# Altium PCB STM32_display_test_board.PcbDoc (part 2 of 2)
Units mil, origin at the board's own origin, x right, y up, seen from the top; angles counter-clockwise.
Board outline 3128.03 x 3003.03 mil, 4 copper layers (Top Layer(SIG/PWR), Int1 (GND), Int2 (GND), Bottom Layer(SIG/PWR)), stack 73.221 mil thick; 85 components, 77 nets, 331 pads, 163 vias.
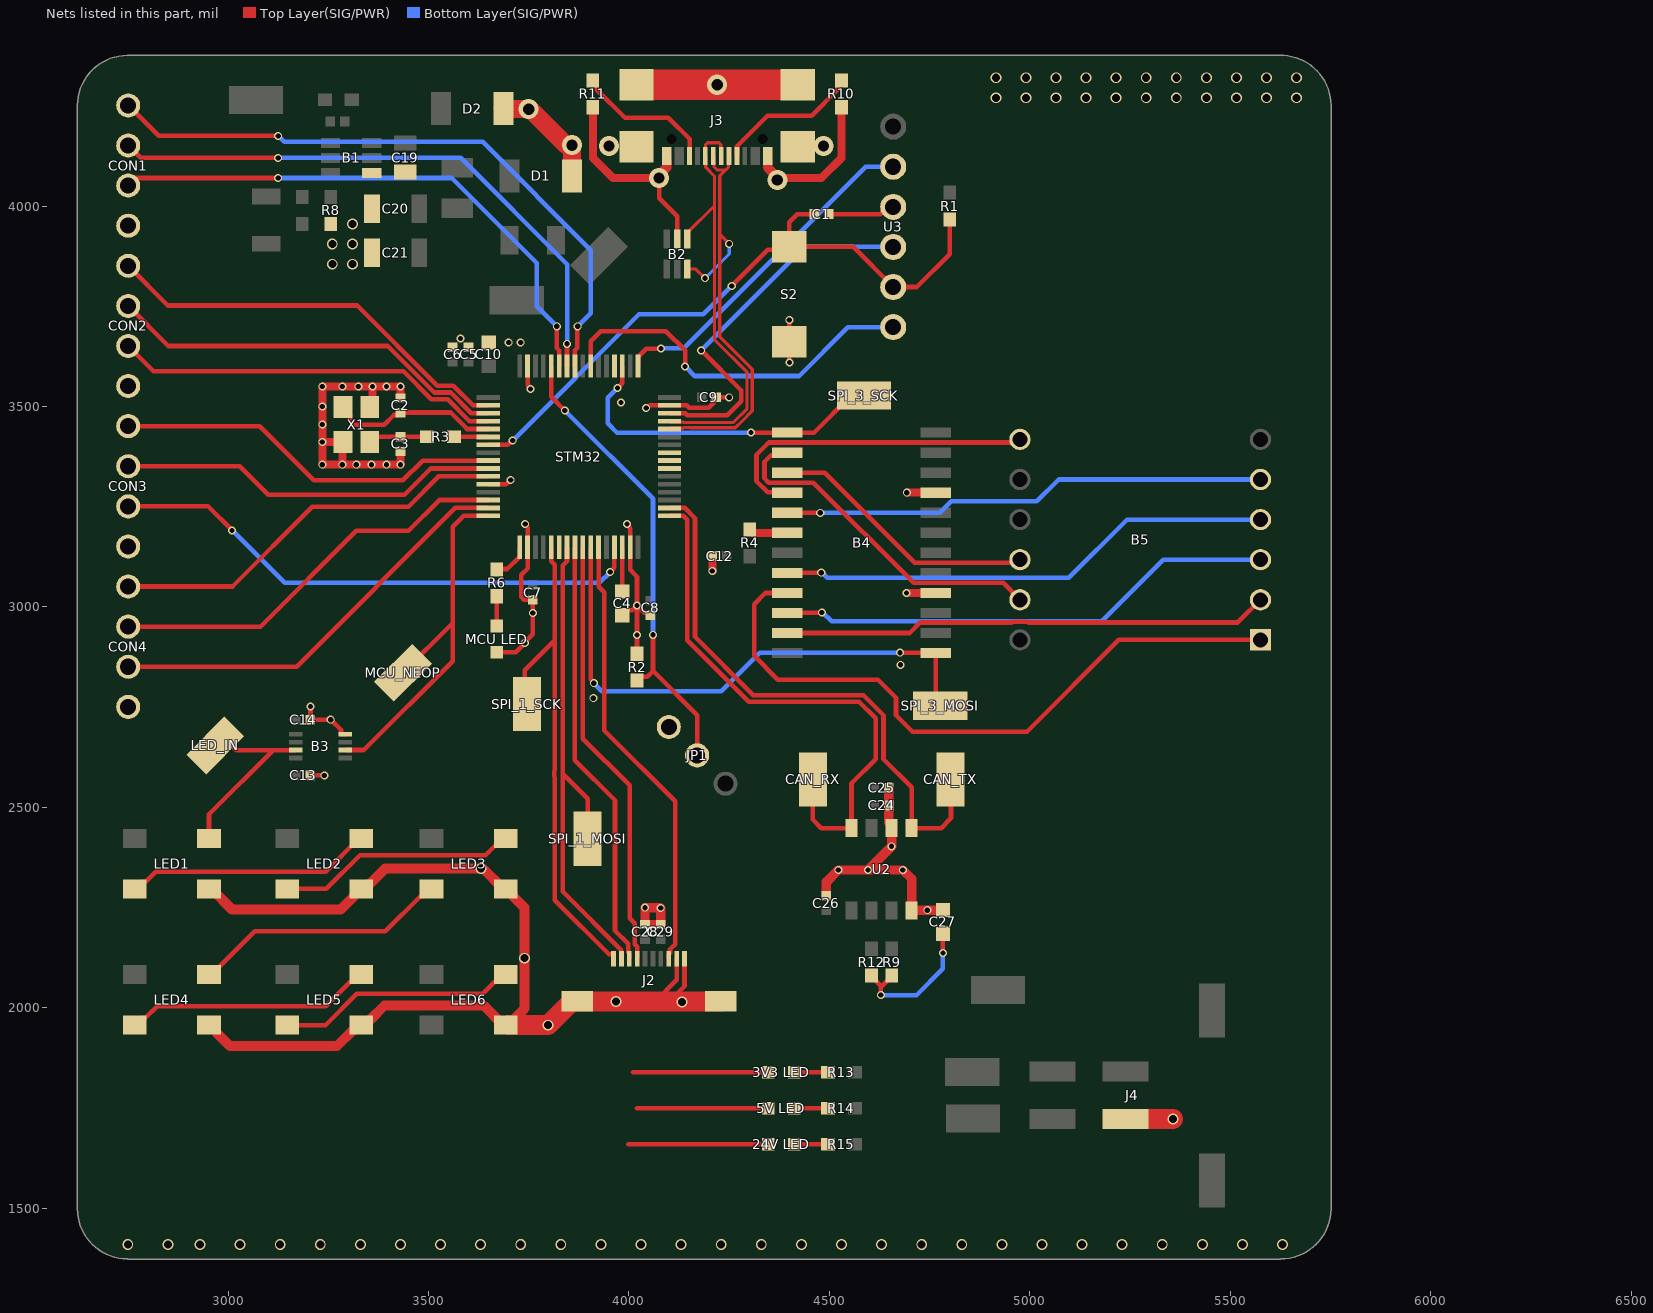
[diagram p4: the nets of this part, all layers, seen from the top]

## Via types
v1: diameter 20, hole 13, Top Layer(SIG/PWR) to Bottom Layer(SIG/PWR), tented both sides, 77 vias
v2: diameter 27, hole 20, Top Layer(SIG/PWR) to Bottom Layer(SIG/PWR), tented both sides, 74 vias
v3: diameter 50, hole 28, Top Layer(SIG/PWR) to Bottom Layer(SIG/PWR), tented both sides, 12 vias

## Nets (pads, with @x,y where several pads share a name; then routed paths per layer and width w, separated by ;. In a path a pad name is that pad's centre, name@x,y a point inside that pad or via, vN(x,y) a via of type N, cw(c..) or ccw(c..) an arc to the next point about the centre after c; other vN are vias at no path point) (continued)
GND: "3V3 LED.1" "5V LED.1" "24V LED.1" "MCU LED.1" B1.1 B2.2 B3.4 B4.4 B4.9 C1.1 C2.1 C3.1 C4.2 C5.1 C6.1 C7.1 C8.1 C9.1 C10.2 C12.1 C13.2 C14.1 C19.2 C20.2 C21.2 C24.1 C25.1 C26.1 C27.1 C28.1 C29.1 CON1.4 CON2.4 CON3.4 CON4.4 D1.1 D2.1 J2.9 J2.10 J2.11 J2.12 J3.A1 J3.A12 J3.B1 J3.B12 J3.MP1 J3.MP2 J3.MP3 J3.MP4 J4.2 JP1.3 LED1.3 LED2.3 LED3.3 LED4.3 LED5.3 LED6.3 R2.2 R8.2 R10.2 R11.2 S2.2 STM32.12 STM32.18 STM32.31 STM32.47 STM32.63 U2.2 U2.8 U3.3 X1.2 X1.4 | length 9029.4
  Top Layer(SIG/PWR) w11.5: C13.2@3205.22,2580 v1(3240,2580) ; v1(3206,2752) 3205.56,2751.56 3205.56,2719.44 C14.1@3205.11,2719 v1(3256.03,2719) 3281.6,2693.43 3281.6,2682.61 3281.76,2682.45 B3.4@3292.58,2682.45 ; STM32.12@3649.09,3306.1 3694.34,3306.1 3705,3316.77 v1(3705,3317) ; 3670,2887.52 3717.52,2887.52 v1(3740,2910) 3740,2911.79 3760,2931.79 C7.1@3760,3017.89 3759.89,3018 3738,3018 3731,3025 3731,3080 3747.05,3096.05 3747.05,3198.65 3741,3204.7 v1(3741,3207) ; STM32.63@3747.05,3600.91 3747.05,3553.25 3754,3546.3 v1(3754,3544) ; C4.2@3983,2979.47 3994.97,2991.44 4007.61,2991.44 v1(4020,3003.83) ; v1(3995,3207) 3995,3204.7 4002.95,3196.75 4002.95,3092.93 4020,3075.88 v1(4020,3003.83) ; 3998.34,1660 4347.52,1660 ; 4010,1840 4347.52,1840 ; 4020,1750 4347.52,1750 ; R2.2@4020,2883.46 v1(4020,3003.83) ; v1(4043,3496) 4045.3,3496 4052.25,3502.95 4144.05,3502.95 4149.83,3497.17 4198.53,3497.17 4211.05,3509.69 4211.05,3516.94 C9.1@4217.11,3523 v1(4250,3523) ; C8.1@4050.61,2979.89 4044.55,2985.95 4037.88,2985.95 v1(4020,3003.83) ; 4065,2016.14 4118.9,2070.04 J2.9@4118.9,2122.44 ; v3(4075,4070) 4075,4019.93 4120,3974.93 B2.2@4120,3917.4 ; 4100,2016.14 4138.58,2054.72 J2.10@4138.58,2122.44 ; v1(4399.95,3716.08) 4399.95,3661.94 S2.2@4400,3661.89 v1(4400,3610) ; C1.1@4498.11,3980 4626.52,3980 4644.52,3998 U3.3@4659,3998
  Top Layer(SIG/PWR) w20: LED4.3@2952.52,1957.01 2958.43,1957.01 2972.05,1943.39 LED4.3@2972.05,1937.48 ; X1.2@3286.54,3411.69 X1.2@3285,3411.69 ; LED5.3@3310.39,1943.39 3318.9,1943.39 3346.14,1970.63 LED5.3@3354.63,1970.63 ; X1.4@3353.47,3498.31 3360,3504.84 v1(3360,3550) ; C3.1@3430,3388.78 v1(3430,3355) v1(3285,3355) ; C2.1@3430,3521.22 v1(3430,3550) v1(3360,3550) ; LED6.3@3686.61,1957.01 LED6.3@3692.52,1957.01 ; R11.2@3910,4246.54 3910,4120 3960,4070 v3(4075,4070) ; v1(4207.89,3090.11) C12.1@4207.89,3127 ; v3(4370,4065) 4374.58,4069.58 4479.58,4069.58 4530,4120 R10.2@4530,4246.54 ; v1(4692,3035) B4.4@4765.51,3035 ; v1(4693,3285) B4.9@4765.51,3285 ; v1(3235,3411.69) v1(3235,3550) v1(3360,3550) ; v1(3235,3411.69) X1.2@3285,3411.69 ; v1(3235,3411.69) v1(3235,3355) v1(3285,3355) ; v1(3285,3355) X1.2@3285,3411.69
  Top Layer(SIG/PWR) w23.5: v3(4075,4070) 4075,4077.17 4093.8,4095.97 J3.A12@4093.8,4114.31 ; J3.B12@4345.77,4114.31 4345.77,4096.41 4370,4072.17 v3(4370,4065) ; C26.1@4492,2279.22 4492.39,2279.22 4492.45,2279.28 4492.45,2314.45 v1(4522,2344) v1(4596,2344) ; C25.1@4648.11,2549 4648.11,2462.89 4655,2456 v1(4655,2403) v1(4596,2344) ; C27.1@4783,2244.06 4782.72,2243.78 4705.28,2243.78 U2.8@4705,2243.5 4705,2322 v1(4683,2344) v1(4596,2344) ; v1@4076.59,2250 cw(c4076.59,2246.59) v1(4079,2249) ; v1@4076.59,2250 cw(c4076.59,2246.59) v1(4079,2249) ; v1@4076.59,2250 cw(c4076.59,2246.59) v1(4079,2249) ; v1@4076.59,2250 cw(c4076.59,2246.59) v1(4079,2249) ; v1@4076.59,2250 cw(c4076.59,2246.59) v1(4079,2249) ; v1@4076.59,2250 cw(c4076.59,2246.59) v1(4079,2249) ; v1@4076.59,2250 cw(c4076.59,2246.59) v1(4079,2249) ; v1@4076.59,2250 cw(c4076.59,2246.59) v1(4079,2249) ; v1@4076.59,2250 v1(4040,2250) C28.1@4040,2208.11 C29.1@4079,2208.11 v1(4079,2249)
  Top Layer(SIG/PWR) w25: LED1.3@2952.52,2297.01 2958.43,2297.01 3010.44,2245 3280.51,2245 3315.49,2279.98 3315.49,2285.89 3326.61,2297.01 LED2.3@3332.52,2297.01 3343.64,2308.13 3352.13,2308.13 3392,2348 v2(3631,2348) 3631.38,2347.62 3636,2347.62 3686.61,2297.01 3698.43,2297.01 3709.55,2285.89 3709.55,2279.98 3739.55,2249.98 3739.55,1998.13 3698.43,1957.01 LED6.3@3692.52,1957.01 ; LED4.3@2972.05,1937.48 3004.53,1905 3272,1905 LED5.3@3310.39,1943.39 ; LED5.3@3354.63,1970.63 3390,2006 3637.62,2006 LED6.3@3686.61,1957.01
  Top Layer(SIG/PWR) w45: D2.1@3683.95,4246 3683.95,4244.41 3686.45,4241.91 v3@3750.09,4241.91 ; v3@3754.09,4240.91 v3@3842.95,4152.05 ; D1.1@3857.95,4075 v3@3857.95,4152.05
  Top Layer(SIG/PWR) w50: LED6.3@3698.43,1957.01 v2(3797.96,1957.01) 3856.5,2015.55 3870.28,2015.55 J2.11@3870.87,2016.14 4065,2016.14 4100,2016.14 J2.12@4229.13,2016.14 ; J4.2@5238.5,1722.94 v2(5356.94,1722.94)
  Top Layer(SIG/PWR) w75: J3.MP2@4018.82,4302.56 J3.MP1@4421.18,4302.56
  other v1: 4744,2243.78 3911.06,2772.57 4676.97,2855.82 4020,2930 3760,2985 3320,3355 3357.5,3355 3395,3355 3235,3455 3235,3500 3980,3510 3285,3550 3325,3550 3395,3550 3700,3660 3730,3660 3580,3670
  other v2: 2750,1410 2850,1410 2930,1410 3030,1410 3130,1410 3230,1410 3330,1410 3430,1410 3530,1410 3630,1410 3730,1410 3830,1410 3930,1410 4030,1410 4130,1410 4230,1410 4330,1410 4430,1410 4530,1410 4630,1410 4730,1410 4830,1410 4930,1410 5030,1410 5130,1410 5230,1410 5330,1410 5430,1410 5530,1410 5630,1410 4132,2015 3967.93,2016.14 3739.55,2124.05 3260,3855 3310,3855 3260,3905 3310,3905 3310,3955 4915,4270 4990,4270 5065,4270 5140,4270 5215,4270 5290,4270 5365,4270 5440,4270 5515,4270 5590,4270 5665,4270 4915,4320 4990,4320 5065,4320 5140,4320 5215,4320 5290,4320 5365,4320 5440,4320 5515,4320 5590,4320 5665,4320
  other v3: 3950,4150 4485,4150 3857.7,4151.8 3749.84,4241.66 4220,4302.56
GPIO_1: CON1.1 STM32.57 | length 1609.1
  Top Layer(SIG/PWR) w11.5: CON1.1@2751,4251 2827,4175 v1(3125,4175) ; STM32.57@3865.16,3600.91 3865.16,3639.8 3871.22,3645.86 3871.22,3699.22 v1(3872,3700)
  Bottom Layer(SIG/PWR) w11.5: v1(3125,4175) 3140,4160 3635,4160 3905,3890 3905,3733 v1(3872,3700)
GPIO_2: CON1.2 STM32.58 | length 1471.1
  Top Layer(SIG/PWR) w11.5: CON1.2@2751,4151 2782,4120 v1(3125,4120) ; STM32.58@3845.47,3600.91 v1(3845.47,3656.53)
  Bottom Layer(SIG/PWR) w11.5: v1(3125,4120) 3580,4120 3845.75,3854.25 3845.75,3656.81 v1(3845.47,3656.53)
GPIO_3: CON1.3 STM32.59 | length 1395.1
  Top Layer(SIG/PWR) w11.5: CON1.3@2751,4051 2770,4070 v1(3125,4070) ; v1(3820,3700) 3819.72,3699.72 3819.72,3645.86 3825.79,3639.8 STM32.59@3825.79,3600.91
  Bottom Layer(SIG/PWR) w11.5: v1(3125,4070) 3558,4070 3770,3858 3770,3750 v1(3820,3700)
GPIO_4: CON2.1 STM32.2 | length 1042.3
  Top Layer(SIG/PWR) w11.5: CON2.1@2751,3851 2850,3752 3322,3752 3522,3552 3562,3552 3610.89,3503.11 3648.94,3503.11 STM32.2@3649.09,3502.95
GPIO_5: CON2.2 STM32.3 | length 1009
  Top Layer(SIG/PWR) w11.5: CON2.2@2751,3751 2851,3651 3398,3651 3514,3535 3555,3535 3606.58,3483.42 3648.94,3483.42 STM32.3@3649.09,3483.27
GPIO_6: CON2.3 STM32.4 | length 975.7
  Top Layer(SIG/PWR) w11.5: CON2.3@2751,3651 2814,3588 3437.67,3588 3507.17,3518.5 3547.5,3518.5 3602.26,3463.74 3648.94,3463.74 STM32.4@3649.09,3463.58
GPIO_10: CON4.1 STM32.11 | length 1011.9
  Top Layer(SIG/PWR) w11.5: CON4.1@2751,3051 3011,3051 3210,3250 3450,3250 3525.79,3325.79 STM32.11@3649.09,3325.79
IOX_RST: STM32.39
LED_1_2: LED1.2 LED2.4 | length 617.2
  Top Layer(SIG/PWR) w11.5: LED1.2@2767.48,2297.01 2785.35,2314.88 2794.88,2314.88 2820,2340 3243.62,2340 3326.61,2422.99 LED2.4@3332.52,2422.99
LED_2_3: LED2.2 LED3.4 | length 597.2
  Top Layer(SIG/PWR) w11.5: LED2.2@3147.48,2297.01 3245.01,2297.01 3329,2381 3642,2381 3666.12,2405.12 3674.65,2405.12 LED3.4@3692.52,2422.99
LED_3_4: LED3.2 LED4.4 | length 643.6
  Top Layer(SIG/PWR) w11.5: LED4.4@2952.52,2082.99 2958.43,2082.99 3066.44,2191 3392,2191 3480.14,2279.14 3489.61,2279.14 LED3.2@3507.48,2297.01
LED_4_5: LED4.2 LED5.4 | length 617.2
  Top Layer(SIG/PWR) w11.5: LED4.2@2767.48,1957.01 2785.35,1974.88 2793.88,1974.88 2823,2004 3244,2004 3305.12,2065.12 3314.65,2065.12 LED5.4@3332.52,2082.99
LED_5_6: LED5.2 LED6.4 | length 597.2
  Top Layer(SIG/PWR) w11.5: LED5.2@3147.48,1957.01 3243.01,1957.01 3321,2035 3635,2035 3665.12,2065.12 3674.65,2065.12 LED6.4@3692.52,2082.99
LED_IN: B3.7 LED1.4 LED_IN.1 | length 491.9
  Top Layer(SIG/PWR) w11.5: LED1.4@2952.52,2422.99 2952.52,2482.87 3112.58,2642.92 ; LED_IN.1@2968,2655 3008.21,2655 3020.29,2642.92 3112.58,2642.92 ; B3.7@3168.57,2643.08 3168.41,2642.92 3112.58,2642.92
MCU_BOOT_0: JP1.2 R2.1 STM32.60 | length 1171.5
  Top Layer(SIG/PWR) w11.5: STM32.60@3806.1,3600.91 3806.1,3523.9 v1(3840,3490) ; R2.1@4020,2816.54 4029.37,2825.91 4045.49,2825.91 4060,2840.41 ; v1@4060,2930 4060,2840.41 ; JP1.2@4170,2630 4170,2730.41 4060,2840.41
  Bottom Layer(SIG/PWR) w11.5: v1(3840,3490) 4060,3270 v1@4060,2930
  other v1: 4059.84,2930.51
MCU_CAN2_RX: CAN_RX.1 STM32.33 U2.4 | length 1404.4
  Top Layer(SIG/PWR) w11.5: STM32.33@4100.91,3227.36 4135.69,3227.36 4145,3218.05 4145,2917.16 4298.66,2763.5 4573.66,2763.5 4615,2722.16 4615,2620 4555,2560 U2.4@4555,2448.5 4479.5,2448.5 4458,2470 4458,2569 CAN_RX.1@4459,2570
MCU_CAN2_TX: CAN_TX.1 STM32.34 U2.1 | length 1437.9
  Top Layer(SIG/PWR) w11.5: STM32.34@4100.91,3247.05 4139.34,3247.05 4164.69,3221.7 4164.69,2925.32 4310,2780 4585,2780 4634.69,2730.32 4634.69,2620.32 4705,2550 U2.1@4705,2448.5 4778.5,2448.5 4803,2473 4803,2569 CAN_TX.1@4802,2570
MCU_I2C_SCL: STM32.41
MCU_I2C_SDA: STM32.40
MCU_LED: R6.1 STM32.17 | length 94
  Top Layer(SIG/PWR) w11.5: R6.1@3670,3093.46 3671.41,3094.87 3696.26,3094.87 3727.21,3125.81 3727.21,3148.94 STM32.17@3727.36,3149.09
MCU_NEOPIXEL: B3.2 MCU_NEOP.1 STM32.16 | length 970.1
  Top Layer(SIG/PWR) w11.5: B3.2@3292.58,2643.08 3292.74,2643.24 3338.24,2643.24 3560,2865 3560,2960 ; MCU_NEOP.1@3436,2836 3560,2960 ; STM32.16@3649.09,3227.36 3587.36,3227.36 3560,3200 3560,2960
MCU_NRST: C1.2 R1.2 S2.1 STM32.7 U3.5 | length 1649.4
  Top Layer(SIG/PWR) w11.5: STM32.7@3649.09,3404.53 3697.23,3404.53 3707.7,3415 v1(3710,3415) ; v1(4256.29,3800.71) 4346.18,3890.6 4392.49,3890.6 S2.1@4400,3898.11 ; C1.2@4461.89,3980 4420,3980 4400,3960 S2.1@4400,3898.11 ; R1.2@4800,3966.54 4800,3880 4718,3798 U3.5@4659,3798 4558.89,3898.11 S2.1@4400,3898.11
  Bottom Layer(SIG/PWR) w11.5: v1(3710,3415) 4025,3730 4185.58,3730 v1(4256.29,3800.71)
MCU_OSC_IN: C2.2 STM32.5 X1.1 | length 419.2
  Top Layer(SIG/PWR) w11.5: X1.1@3286.54,3498.31 3304.41,3480.44 3304.41,3464.59 3314,3455 3390,3455 3413.94,3478.94 3423.94,3478.94 C2.2@3430,3485 3555,3485 3596.1,3443.9 STM32.5@3649.09,3443.9
MCU_OSC_OUT: R3.2 STM32.6 | length 86.6
  Top Layer(SIG/PWR) w11.5: R3.2@3563.46,3425 3563.46,3424.21 STM32.6@3649.09,3424.21 STM32.6@3648.94,3424.37
MCU_SPI1_MISO: STM32.22
MCU_SPI1_MOSI: J2.2 SPI_1_MOSI.1 STM32.23 | length 1279.6
  Top Layer(SIG/PWR) w11.5: STM32.23@3845.47,3149.09 3845.47,3114.31 3834.68,3103.52 3834.68,2584 ; SPI_1_MOSI.1@3897,2422 3897,2521.68 3834.68,2584 ; J2.2@3981.1,2122.44 3980.95,2122.59 3980.95,2144.05 3834.68,2290.32 3834.68,2584
MCU_SPI1_SCK: J2.1 SPI_1_SCK.1 STM32.21 | length 1291.6
  Top Layer(SIG/PWR) w11.5: SPI_1_SCK.1@3746,2758 3740,2764 3740,2842 3815,2917 ; STM32.21@3806.1,3149.09 3806.1,3114.31 3815,3105.41 3815,2917 ; J2.1@3961.42,2122.44 3961.42,2133.63 3961.26,2133.78 3950.08,2133.78 3815,2268.86 3815,2575.66 3813.18,2577.48 3813.18,2590.52 3815,2592.34 3815,2917
MCU_SPI2_MISO: CON3.2 STM32.10 | length 954.6
  Top Layer(SIG/PWR) w11.5: CON3.2@2751,3351 3029,3351 3100,3280 3440,3280 3505.47,3345.47 STM32.10@3649.09,3345.47
MCU_SPI2_MOSI: CON3.1 STM32.9 | length 974.4
  Top Layer(SIG/PWR) w11.5: CON3.1@2751,3451 3079,3451 3214,3316 3436,3316 3485.16,3365.16 STM32.9@3649.09,3365.16
MCU_SPI2_SCK: CON3.3 STM32.29 | length 1358.8
  Top Layer(SIG/PWR) w11.5: CON3.3@2751,3251 2950,3251 v1(3010,3191) ; v1(3953,3087) 3963.58,3097.58 STM32.29@3963.58,3149.09
  Bottom Layer(SIG/PWR) w11.5: v1(3010,3191) 3141,3060 3926,3060 v1(3953,3087)
MCU_SPI3_MISO: STM32.52
MCU_SPI3_MOSI: B4.1 SPI_3_MOSI.1 STM32.26 | length 1394.9
  Top Layer(SIG/PWR) w11.5: STM32.26@3904.53,3149.09 3904.53,2820.02 3912.25,2812.3 v1(3912.25,2810) ; v1(4676,2886) 4676.5,2885.5 4765.01,2885.5 B4.1@4765.51,2885 4765.51,2764.49 SPI_3_MOSI.1@4787,2743
  Bottom Layer(SIG/PWR) w11.5: v1(3912.25,2810) 3932.25,2790 4229.84,2790 4325.84,2886 v1(4676,2886)
MCU_SPI3_SCK: B4.13 SPI_3_SCK.1 STM32.51 | length 844.6
  Top Layer(SIG/PWR) w11.5: v1(3971,3546) 3983.27,3558.27 STM32.51@3983.27,3600.91 ; v1(4304,3435) B4.13@4394.49,3435 4461.5,3435 4553.5,3527 SPI_3_SCK.1@4586,3527
  Bottom Layer(SIG/PWR) w11.5: v1(3971,3546) 3947,3522 3947,3458 3970,3435 v1(4304,3435)
MCU_SWCLK: STM32.49 U3.2 | length 855.8
  Top Layer(SIG/PWR) w11.5: STM32.49@4022.64,3600.91 4022.64,3624.04 4042.98,3644.37 4079.37,3644.37 v1(4080,3645)
  Bottom Layer(SIG/PWR) w11.5: v1(4080,3645) 4137,3645 4590,4098 U3.2@4659,4098
MCU_SWDIO: STM32.46 U3.4 | length 950.1
  Top Layer(SIG/PWR) w11.5: STM32.46@4100.91,3483.27 4101.06,3483.11 4140.55,3483.11 4145.67,3478 4245,3478 4280,3513 4280,3540 v1(4180,3640)
  Bottom Layer(SIG/PWR) w11.5: v1(4180,3640) 4438,3898 U3.4@4659,3898
MCU_SWO: STM32.55 U3.6 | length 947
  Top Layer(SIG/PWR) w11.5: STM32.55@3904.53,3600.91 3904.53,3662.53 3930,3688 4092,3688 4140,3640 v1(4140,3600)
  Bottom Layer(SIG/PWR) w11.5: v1(4140,3600) 4164,3576 4424,3576 4546,3698 U3.6@4659,3698
MCU_UART_4_RX: CON4.3 STM32.15 | length 1062.1
  Top Layer(SIG/PWR) w11.5: CON4.3@2751,2851 3171,2851 3567.05,3247.05 STM32.15@3649.09,3247.05
MCU_UART_4_TX: CON4.2 STM32.14 | length 1028.9
  Top Layer(SIG/PWR) w11.5: CON4.2@2751,2951 3081,2951 3320,3190 3450,3190 3526.73,3266.73 STM32.14@3649.09,3266.73
MCU_USB_N: B2.6 J3.A7 J3.B7 STM32.44 | length 1164.8
  Top Layer(SIG/PWR) w7.81: STM32.44@4100.91,3443.9 4102.9,3445.9 4134.73,3445.9 4136.17,3447.33 4151.8,3447.33 4151.94,3447.19 4265.31,3447.19 4281.81,3463.69 4307.47,3489.35 4307.47,3592.53 4226.25,3673.75 4226.25,3929.5 ; B2.6@4145.59,3842.6 4166.93,3842.6 v1(4189.53,3820) v1@4186.23,3820 ; J3.A7@4210,4125 4212,4123 4212,4098 4220,4090 4241,4090 ; J3.B7@4249.37,4125 4248.04,4123.67 4248.04,4097.04 4241,4090 ; v1(4250,3905.75) 4226.25,3929.5 ; 4226.25,3929.5 4226.25,4075.25 4241,4090
  Bottom Layer(SIG/PWR) w7.81: v1@4190,3820.47 4250,3880.47 v1(4250,3905.75)
MCU_USB_P: B2.1 J3.A6 J3.B6 STM32.45 | length 1093.4
  Top Layer(SIG/PWR) w7.81: STM32.45@4100.91,3463.58 4102.9,3461.58 4134.73,3461.58 4136.17,3460.15 4157.1,3460.15 4157.25,3460 4260,3460 4294.66,3494.66 4294.66,3585.34 4213.44,3666.56 4213.44,3970 4213.44,4000 ; B2.1@4145.59,3917.4 4145.59,3933.15 4212.44,4000 4213.44,4000 ; J3.A6@4229.69,4125 4228.81,4125.87 4228.81,4153.42 4224.24,4158 4195.76,4158 4191.19,4153.42 4191.19,4125.87 4190.31,4125 4191.3,4124.01 4191.3,4096.7 4213.44,4074.56 4213.44,4000
"Net3V3 LED_2": "3V3 LED.2" R13.2 | length 84.1
  Top Layer(SIG/PWR) w11.5: 4412.48,1840 R13.2@4496.54,1840
"Net5V LED_2": "5V LED.2" R14.2 | length 84.1
  Top Layer(SIG/PWR) w11.5: 4412.48,1750 R14.2@4496.54,1750
"Net24V LED_2": "24V LED.2" R15.2 | length 84.1
  Top Layer(SIG/PWR) w11.5: 4412.48,1660 R15.2@4496.54,1660
NetB4_18: B4.18 R4.1 | length 98.1
  Top Layer(SIG/PWR) w20: R4.1@4301,3193.46 4301,3191.5 4307.5,3185 B4.18@4394.49,3185
NetC27_2: C27.2 R9.2 R12.1 | length 367.6
  Top Layer(SIG/PWR) w11.5: R12.1@4605,2080.54 4605,2078.58 4628,2055.58 4628,2051.58 ; v1(4628,2032) 4628,2051.58 ; R9.2@4655,2080.54 4655,2078.58 4628,2051.58 ; v1(4783,2137) C27.2@4783,2185
  Bottom Layer(SIG/PWR) w11.5: v1(4628,2032) 4717,2032 4783,2098 v1(4783,2137)
NetJ3_A5: J3.A5 R10.1 | length 360.7
  Top Layer(SIG/PWR) w11.5: J3.A5@4269.21,4125.2 4269.37,4125.35 4269.37,4149.41 4345.41,4225.45 4455.45,4225.45 4520,4290 4520,4303.46 R10.1@4530,4313.46
NetJ3_B5: J3.B5 R11.1 | length 351.6
  Top Layer(SIG/PWR) w11.5: R11.1@3910,4313.46 3920,4303.46 3920,4290 3990,4220 4098.34,4220 4151.1,4167.24 J3.B5@4151.1,4125.2
"NetMCU LED_2": "MCU LED.2" R6.2 | length 74.1
  Top Layer(SIG/PWR) w11.5: 3670,2952.48 R6.2@3670,3026.54
SEGA: B4.14 B5.11 | length 869.4
  Top Layer(SIG/PWR) w11.5: B4.14@4394.49,3385 4387.44,3377.95 4354.19,3377.95 4338,3361.76 4338,3321 4349,3310 4460,3310 4710,3060 4933,3060 B5.11@4975,3018
SEGB: B4.16 B5.7 | length 827.2
  Top Layer(SIG/PWR) w11.5: B4.16@4394.49,3285 4393.57,3285.92 4346.08,3285.92 4318,3314 4318,3380 4348.25,3410.25 4967.25,3410.25 B5.7@4975,3418
SEGC: B4.20 B5.4 | length 1245.5
  Top Layer(SIG/PWR) w11.5: B4.20@4394.49,3085 v1@4479,3085
  Bottom Layer(SIG/PWR) w11.5: v1(4479.5,3085.5) 4481.8,3085.5 4494.62,3072.68 5096.68,3072.68 5242,3218 B5.4@5575,3218
SEGD: B4.23 B5.2 | length 1216.4
  Top Layer(SIG/PWR) w11.5: B4.23@4394.49,2935 4699.62,2935 4726.07,2961.45 4954.37,2961.45 4956.23,2963.32 4993.77,2963.32 4995.63,2961.45 5518.45,2961.45 B5.2@5575,3018
SEGDP: B4.22 B5.3 | length 1253.8
  Top Layer(SIG/PWR) w11.5: B4.22@4394.49,2985 4394.99,2985.5 4480.5,2985.5 v1(4481,2986)
  Bottom Layer(SIG/PWR) w11.5: v1(4481,2986) 4483.3,2986 4505.3,2964 5178.64,2964 5332.64,3118 B5.3@5575,3118
SEGE: B4.21 B5.1 | length 1685
  Top Layer(SIG/PWR) w11.5: B4.21@4394.49,3035 4340,3035 4312,3007 4312,2878 4371,2819 4621,2819 4666,2774 4666,2730 4707,2689 4992.61,2689 5221.61,2918 B5.1@5575,2918
SEGF: B4.15 B5.10 | length 677
  Top Layer(SIG/PWR) w11.5: B4.15@4394.49,3335 4488,3335 4713,3110 4947.44,3110 ; 4947.47,3110.03 4967.03,3110.03 B5.10@4975,3118
SEGG: B4.17 B5.5 | length 1214.9
  Top Layer(SIG/PWR) w11.5: B4.17@4394.49,3235 v1(4477,3235)
  Bottom Layer(SIG/PWR) w11.5: v1(4477,3235) 4775,3235 4803.32,3263.32 5017.32,3263.32 5072,3318 B5.5@5575,3318
SHARP_CS: J2.3 STM32.24 | length 1082.8
  Top Layer(SIG/PWR) w11.5: STM32.24@3865.16,3149.09 3865.16,2617.84 3965,2518 3965,2193 3997.76,2160.24 3997.76,2139.26 4000.79,2136.22 J2.3@4000.79,2122.44
SHARP_EXTMODE: J2.8 STM32.27 | length 1112.2
  Top Layer(SIG/PWR) w11.5: STM32.27@3924.21,3149.09 3924.21,3050.79 3938,3037 3938,2692 4115,2515 4115,2159.33 4102.24,2146.58 4102.24,2136.66 4099.21,2133.63 J2.8@4099.21,2122.44
SHARP_VCOMM: J2.4 STM32.25 | length 1082.8
  Top Layer(SIG/PWR) w11.5: STM32.25@3884.84,3149.09 3884.84,2671.74 4001.5,2555.08 4001.5,2223.94 4014.26,2211.19 4014.26,2158.42 4020.32,2152.36 4020.32,2122.59 J2.4@4020.47,2122.44
VCAP_1: C4.1 STM32.30 | length 110.7
  Top Layer(SIG/PWR) w11.5: C4.1@3983,3038.53 3983.27,3038.8 STM32.30@3983.27,3149.09
XTAL_IN: C3.2 R3.1 X1.3 | length 148.6
  Top Layer(SIG/PWR) w11.5: X1.3@3353.47,3411.69 3366.77,3425 C3.2@3430,3425 R3.1@3496.54,3425
pads on no net: B2.3 B2.4 B2.5 B3.3 B3.6 B4.3 B4.5 B4.8 B4.10 B4.24 J3.A8 J3.B8 J3.MH1 J3.MH2 J4.PAD1 J4.PAD2 LED6.2 STM32.8 STM32.20 STM32.28 STM32.35 STM32.36 STM32.37 STM32.38 STM32.42 STM32.43 STM32.53 STM32.54 STM32.56 STM32.61 STM32.62

## Polygon pours and split planes (outlines as drawn)
GND on Top Layer(SIG/PWR) "GND_L01_P014" (solid, pour order 14): 4540,4115 4540,4245 4510,4245 4455,4190 4375,4190 4340,4155 4340,4100 4380,4060 4485,4060
GND on Top Layer(SIG/PWR) "GND_L01_P013" (solid, pour order 13): 3900,4115 3900,4245 3930,4245 3985,4190 4065,4190 4100,4155 4100,4100 4060,4060 3955,4060
GND on Top Layer(SIG/PWR) "GND_L01_P001" (solid, pour order 1): 3626,3636 3632,3642 3736.81,3642 3741,3637.81 3741,3616 3753,3616 3753,3671 3746,3678 3548,3678 3540,3670 3540,3636
GND on Top Layer(SIG/PWR) "GND_L01_P012" (solid, pour order 12): 5750,4175 4945,4175 cw(c4945,4305) 4815,4305 4815,4375 5626.52,4375 cw(c5626.52,4251.52) 5750,4251.52
GND on Top Layer(SIG/PWR) "Top Layer(SIG/PWR)-GND" (solid, pour order 9): 4050,1530 4050,1504.9 ccw(c4087.69,1504.99) 4087.79,1467.3 5593.39,1467.3 5667.02,1467.02 ccw(c5667.02,1550) 5750,1550 5750,1497.86 cw(c5627.14,1497.86) 5627.14,1375 2748.48,1375 cw(c2748.48,1498.48) 2625,1498.48 2625,1550 ccw(c2725,1550) 2668.78,1467.3 ccw(c2682.87,1481.05) 2682.63,1461.36 2687.92,1461.36 ccw(c2687.93,1470.01) 2694.04,1463.9 2696.37,1466.23 ccw(c2687.61,1475) 2700.01,1475 2700,1500 2700,1820 cw(c2730,1820) 2730,1850 4020,1850 cw(c4020,1820) 4050,1820
+5V on Top Layer(SIG/PWR) "+5V_L01_P002" (solid, pour order 2): 3478,4282 3515,4282 3515,4210 3488,4210 3478,4200 3478,4147 3470,4139 3399,4139 3393,4145 3334,4145 3334,4230 3325,4238 3300,4238 3291,4247 3291,4282 3359,4282
+3V3 on Top Layer(SIG/PWR) "+3V3_L01_P003" (solid, pour order 3): 3457,4029 3612,4029 3616,4025 3616,3815 3601,3800 3472,3800 3457,3815
GND on Top Layer(SIG/PWR) "GND_L01_P004" (solid, pour order 4): 3470,4103 3408,4103 3400,4095 3334,4095 3334,4029 3284,3979 3237,3979 3233,3975 3233,3839 3246,3826 3378,3826 3390,3838 3390,4035 3404,4049 3464,4049 3470,4055
+3V3 on Top Layer(SIG/PWR) "+3V3_L01_P000" (solid, pour order 0): 3716,3624 3722,3630 3733,3630 3733,3572 3691,3572 3678,3559 3678,3517 3620,3517 3620,3560 3608,3572 3549,3572 3540,3581 3540,3624
GND on Bottom Layer(SIG/PWR) "GND_L04_P011" (solid, pour order 11): 5750,4175 4945,4175 cw(c4945,4305) 4815,4305 4815,4375 5626.52,4375 cw(c5626.52,4251.52) 5750,4251.52
GND on Bottom Layer(SIG/PWR) "GND_L04_P010" (solid, pour order 10): 5750,1550 5750,1498.48 cw(c5626.52,1498.48) 5626.51,1375 2748.48,1375 cw(c2748.48,1498.48) 2625,1498.48 2625,1545 2625,1550
GND on Int1 (GND) "GND_L02_P005" (solid, pour order 5): 2650,4250 cw(c2750,4250) 2750,4350 5625,4350 cw(c5625,4250) 5725,4250 5725,1500 cw(c5625,1500) 5625,1400 2750,1400 cw(c2750,1500) 2650,1500 2650,1650
GND on Int2 (GND) "GND_L03_P006" (solid, pour order 6): 2650,4250 cw(c2750,4250) 2750,4350 5625,4350 cw(c5625,4250) 5725,4250 5725,1500 cw(c5625,1500) 5625,1400 2750,1400 cw(c2750,1500) 2650,1500 2650,1650

## Other copper
Top Layer(SIG/PWR):
  region net GND: 3982.56,1758.41 3982.56,1820.79 4013.75,1820.79 4013.75,1659.82 3982.56,1659.82 3982.56,1723.2 3964.45,1723.2 3964.45,1724.21 3922.2,1724.21 3922.2,1723.2 3904.09,1723.2 3904.09,1659.82 3872.9,1659.82 3872.9,1820.79 3904.09,1820.79 3904.09,1751.37 3982.56,1751.37 3982.56,1757.41
  region net GND: 615 vertices and 0 holes, not listed, extent 3692.8,1656.8 3848.75,1823.81
  region net GND: 3550.95,1801.68 3550.95,1820.79 3669.66,1820.79 3669.66,1793.63 3582.13,1793.63 3582.13,1753.38 3659.6,1753.38 3659.6,1725.21 3582.13,1725.21 3582.13,1687.99 3669.66,1687.99 3669.66,1659.82 3550.95,1659.82 3550.95,1800.67
  region net GND: 261 vertices and 1 holes, not listed, extent 3088.14,1477.71 3215.91,1629.63
  region net GND: 589 vertices and 0 holes, not listed, extent 3754.18,1474.7 3910.12,1632.65
  region net GND: 3540.88,1556.19 3540.88,1628.63 3541.89,1628.63 3541.89,1629.63 3570.06,1629.63 3570.06,1477.71 3540.88,1477.71 3540.88,1555.18
  region net GND: 578 vertices and 0 holes, not listed, extent 3372.87,1474.7 3519.76,1631.65
  region net GND: 373 vertices and 0 holes, not listed, extent 3602.26,1477.71 3735.06,1629.63
  region net GND: 407 vertices and 0 holes, not listed, extent 3243.08,1659.82 3395,1820.79
  region net GND: 360 vertices and 1 holes, not listed, extent 3222.96,1477.71 3379.91,1629.63
  region net GND: 3230,1720.18 3230,1659.82 3199.82,1659.82 3199.82,1723.2 3120.34,1723.2 3120.34,1659.82 3089.15,1659.82 3089.15,1820.79 3120.34,1820.79 3120.34,1751.37 3199.82,1751.37 3199.82,1820.79 3230,1820.79 3230,1721.19
  region net GND: 3490.58,1820.79 3530.82,1820.79 3530.82,1793.63 3484.54,1793.63 3484.54,1659.82 3453.35,1659.82 3453.35,1793.63 3407.07,1793.63 3407.07,1820.79 3489.57,1820.79
  region net GND: 211 vertices and 2 holes, not listed, extent 2724.94,1477.71 3068.02,1820.79

## Silkscreen, mask and mechanical layers (free items; w line width, h text height)
Top Overlay:
  lines w3: 4060,2660 4040,2640 4105,2575 4125,2595 ; 4140,2580 4120,2560 4185,2495 4205,2515
  text "GPIO 1" at 2806,4241 h20
  text "GPIO 2" at 2806,4141 h20
  text "GPIO 3" at 2806,4041 h20
  text "GND" at 2806,3941 h20
  text "GPIO 4" at 2806,3841 h20
  text "GPIO 5" at 2806,3741 h20
  text "GPIO 6" at 2806,3641 h20
  text "GND" at 2806,3541 h20
  text "GPIO 7 (SPI 2 MOSI)" at 2806,3441 h20
  text "GPIO 8 (SPI 2 MISO)" at 2806,3341 h20
  text "GPIO 9 (SPI 2 SCK)" at 2806,3241 h20
  text "GND" at 2806,3141 h20
  text "GPIO 10" at 2806,3041 h20
  text "GPIO 11 (UART 4 TX)" at 2806,2941 h20
  text "GPIO 12 (UART 4 RX)" at 2806,2841 h20
  text "GND" at 2806,2741 h20
  text "Normal / Boot" at 3978.76,2601.24 h20 r315
  text "USB / Flash" at 4064.66,2510.34 h20 r315
  text "STM32 Display Test Board / Designed by: Walker Burns" at 4100,1485 h30
Top Solder:
  region: 5751.09,4213.73 4951.09,4213.73 cw(c4951.09,4313.73) 4851.09,4313.73 4851.09,4375.47 5627.6,4375.47 cw(c5627.6,4251.98) 5751.09,4251.98 5751.09,4230.47
  region: 2625,1550 ccw(c2725,1550) 2725,1450 5650,1450 ccw(c5650,1550) 5750,1550 5750,1475 cw(c5650,1475) 5650,1375 2725,1375 cw(c2725,1475) 2625,1475
Bottom Solder:
  region: 5750,4213.26 4950,4213.26 cw(c4950,4313.26) 4850,4313.26 4850,4375 5626.52,4375 cw(c5626.52,4251.52) 5750,4251.52 5750,4230
  region: 2625,1550 ccw(c2725,1550) 2725,1450 5650,1450 ccw(c5650,1550) 5750,1550 5750,1475 cw(c5650,1475) 5650,1375 2725,1375 cw(c2725,1475) 2625,1475
Mechanical 1:
  lines w2: 2625,1500 ccw(c2750,1500) 2750,1375 ; 2625,4250 cw(c2750,4250) 2750,4375 ; 5625,1375 ccw(c5625,1500) 5750,1500 ; 5625,4375 cw(c5625,4250) 5750,4250
  lines w3: 2625,1500 2625,4250 ; 2750,1375 5625,1375 ; 2750,4375 5631.01,4375 ; 5750,1500 5750,4250